# Altium PCB PCB1_Tejas.PcbDoc (part 1 of 2)
Units mm, origin at the board's own origin, x right, y up, seen from the top; angles counter-clockwise.
Board outline 78.61 x 97.49 mm, 2 copper layers (Top Layer, Bottom Layer); 119 components, 67 nets, 500 pads, 65 vias.
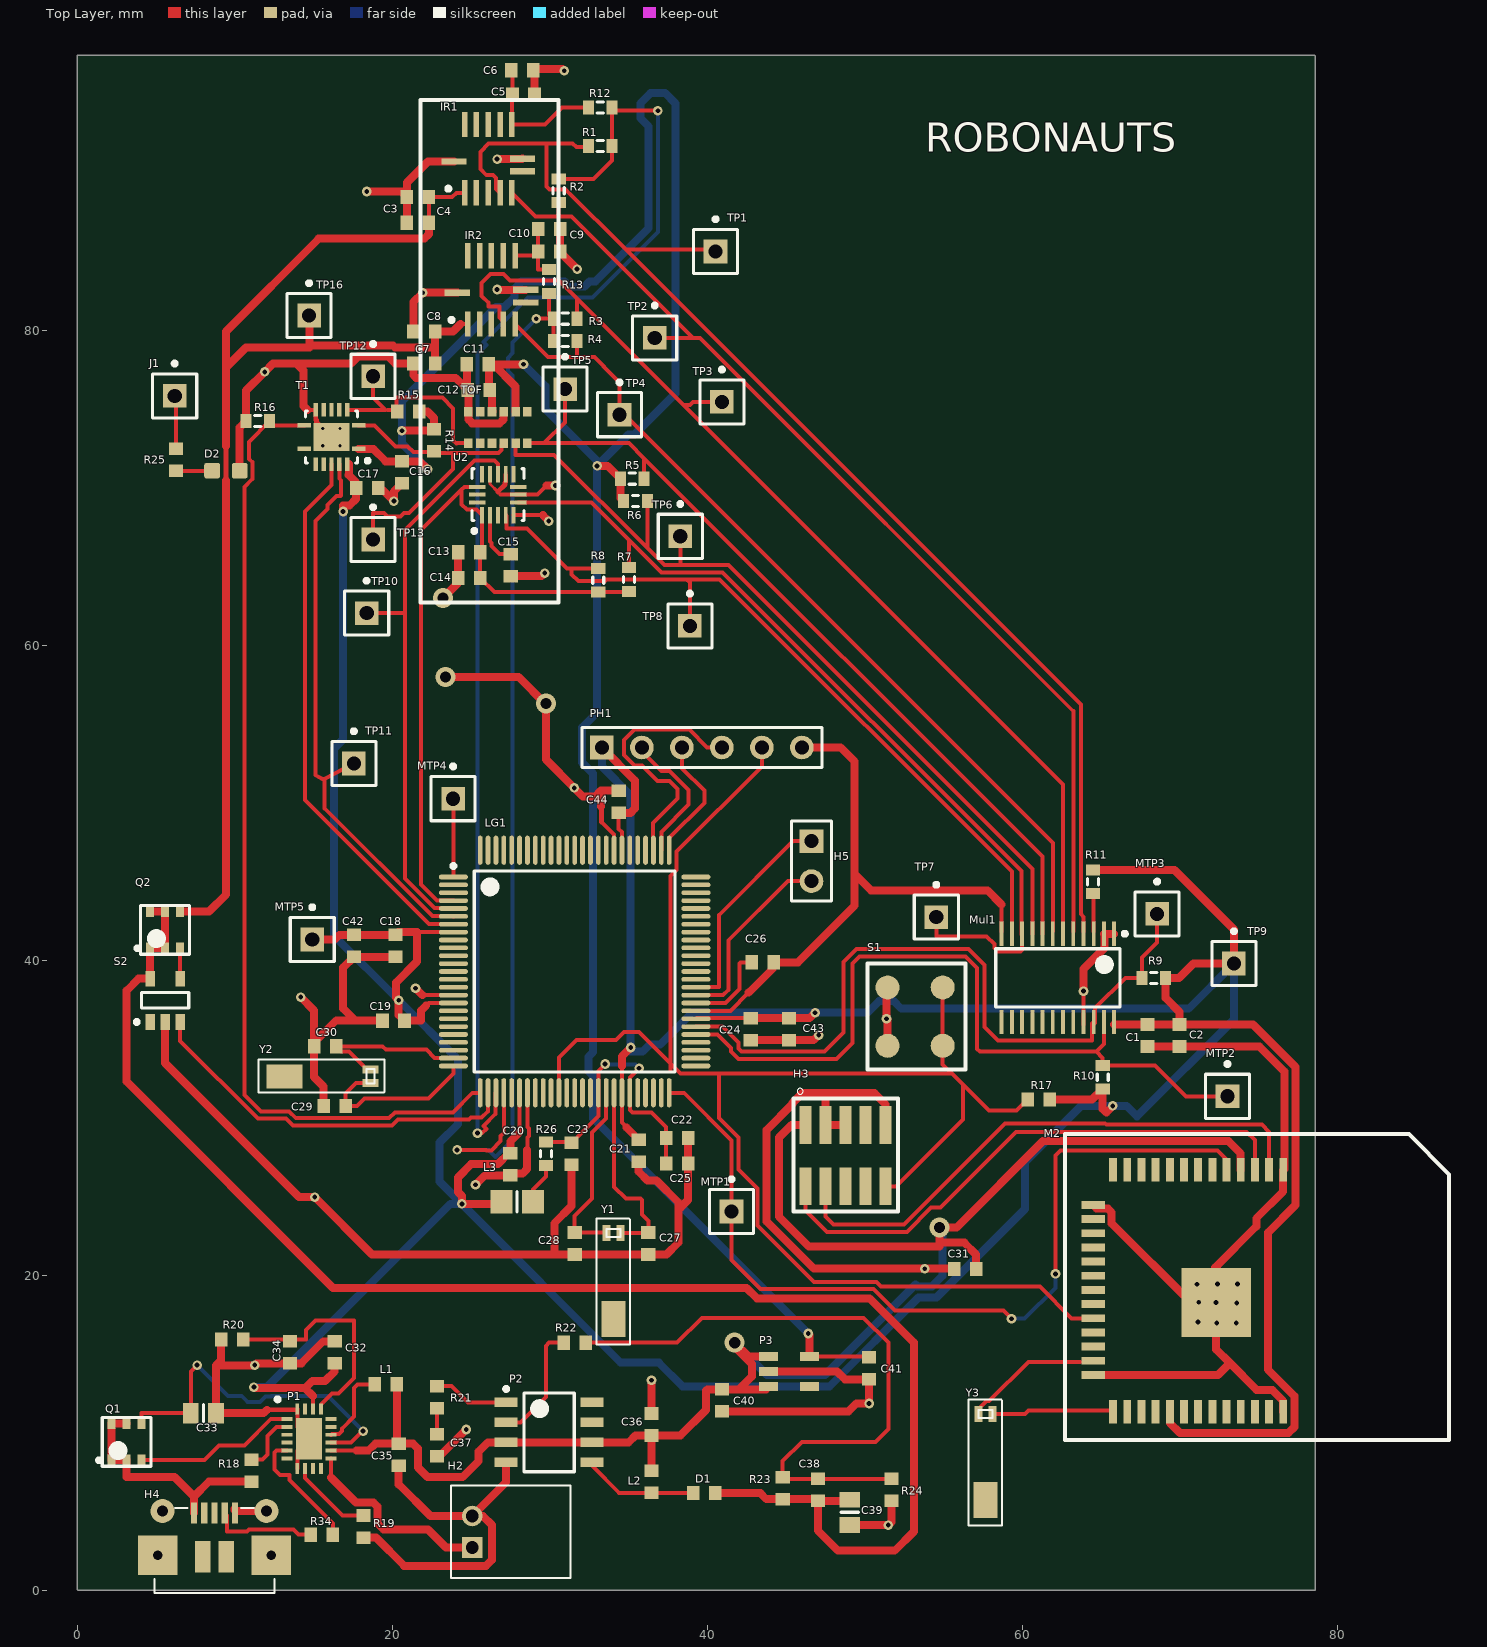
[diagram p0: Top Layer view]
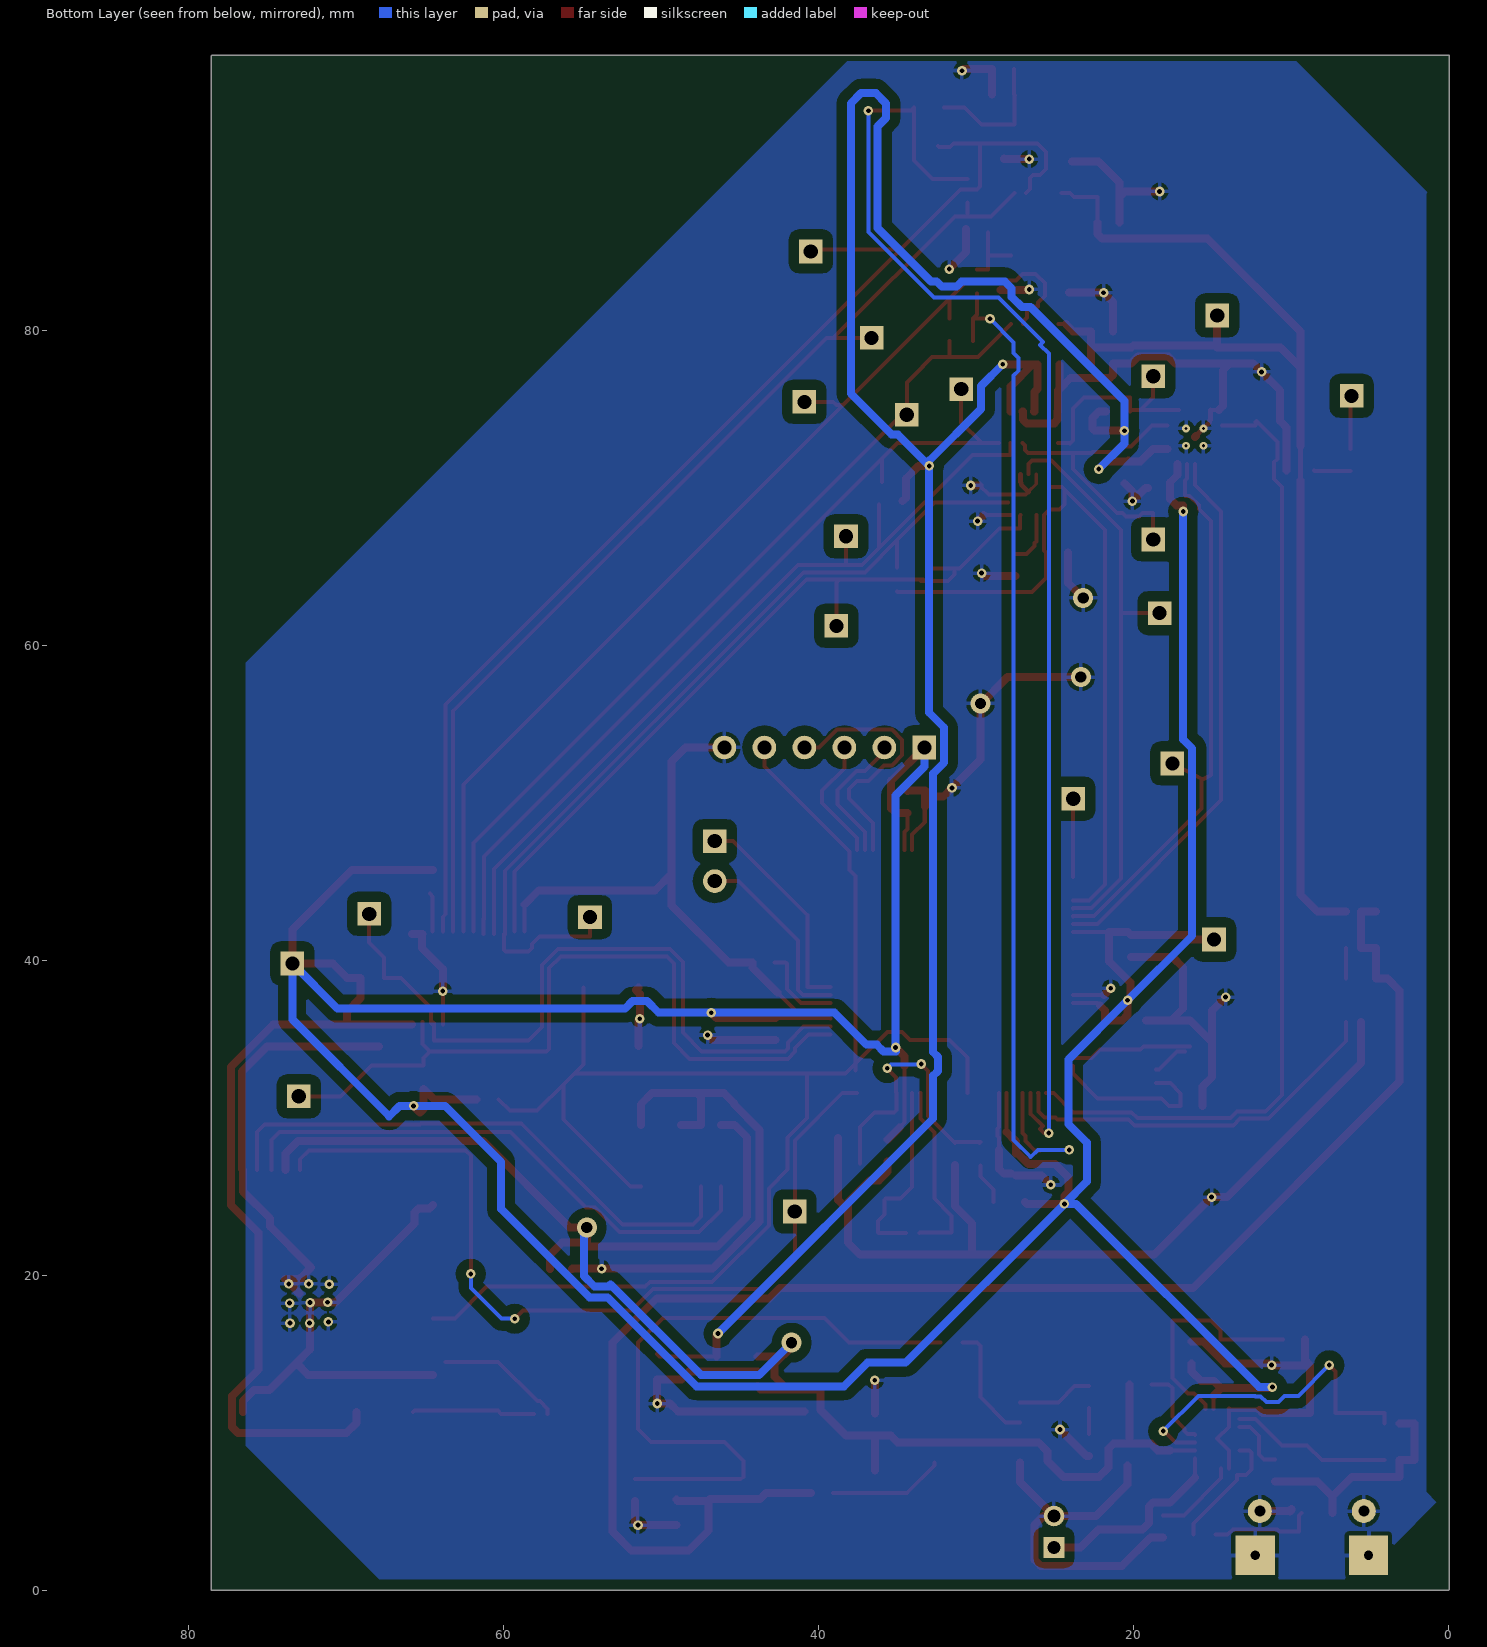
[diagram p1: Bottom Layer view, seen from below]

## Layer stack, top to bottom
Top Solder: solder mask 0.0102, Solder Resist, Dk 3.5
Top Layer: signal copper 0.0356
Dielectric1: dielectric 0.32, FR-4, Dk 4.8
Bottom Layer: signal copper 0.0356
Bottom Solder: solder mask 0.0102, Solder Resist, Dk 3.5

## Board outline
0,0 78.562,0 78.562,97.434 78.511,97.485 78.486,97.46 -0.051,97.46 -0.051,0.051

## Design rules (kind name [scope] priority, off if disabled: settings)
Clearance [All] p1: gap=0.254 ignorepadtopadclearanceinfootprint=TRUE except(0: Arc-Hole Track-Hole SMDPad-Hole THPad-Hole Via-Hole Fill-Hole Poly-Hole Region-Hole Text-Hole; 0.171: Track-SMDPad; 0.203: Arc-SMDPad Track-Track SMDPad-SMDPad; 0.508: Arc-Via Track-Via THPad-Via Via-Via; 0.635: Arc-Poly Track-Poly SMDPad-Poly THPad-Poly Via-Poly Fill-Poly Poly-Poly)
FabricationTestPointUsage TestPointUsage [All] p1: valid=0 allowmultiple=FALSE
FabricationTestpoint Testpoint [All] p1: side=3 testpointundercomponent=TRUE minsize=1.016 maxsize=2.54 preferedsize=1.524 minholesize=0 maxholesize=1.016 preferedholesize=0.813 testpointgrid=0.025 allowsidetop=TRUE allowsidebottom=TRUE usegrid=TRUE gridtolerance=0
PolygonConnect [All] p1: connectstyle=Relief reliefconductorwidth=0.254 reliefentries=4 polygonreliefangle="90 Angle" airgapwidth=0.254
RoutingVias [All] p1: holewidth=0.305 width=0.61 viastyle="Through Hole" minholewidth=0.254 minwidth=0.508 maxholewidth=0.356 maxwidth=0.711
SilkToSolderMaskClearance SilkscreenOverComponentPads [IsPad] p1: minsilkscreentomaskgap=0.254 clearancetoexposedcopper=TRUE
SolderMaskExpansion [All] p1: expansion=0.102
Width Width_power [(InNet('2.8V') OR InNet('3.3V') OR InNet('5V') OR InNet('4V') OR InNet('GND') OR InNet('VBUS') OR InNet('IR_PWR') OR InNet('V_BAT'))] p1: maxlimit=0.508 minlimit=0.305 preferedwidth=0.508
Width Width_1 [All] p2: maxlimit=0.254 minlimit=0.254 preferedwidth=0.254
27 further rules are at their usual default settings.

## Components (designator, comment, footprint, x,y, rotation, side; value= is the part's Value field where it differs from the comment)
C1 "Cap Semi" 1608[0603] 67.92,35.23 r90 top value=10uF
C2 "Cap Semi" 1608[0603] 69.952,35.23 r90 top value=0.1uF
C3 "Cap Semi" 1608[0603] 21.59,88.468 r0 top value=0.1uF
C4 "Cap Semi" 1608[0603] 21.59,86.843 r0 top value=22uF
C5 "Cap Semi" 1608[0603] 28.219,96.52 r180 top value=10uF
C6 "Cap Semi" 1608[0603] 28.296,94.971 r180 top value=0.1uF
C7 "Cap Semi" 1608[0603] 21.996,77.902 r0 top value=0.1uF
C8 "Cap Semi" 1608[0603] 21.996,79.934 r0 top value=22uF
C9 "Cap Semi" 1608[0603] 29.921,86.436 r180 top value=10uF
C10 "Cap Semi" 1608[0603] 29.921,85.014 r180 top value=0.1uF
C11 "Cap Semi" 1608[0603] 25.4,77.851 r0 top value=4.7uF
C12 "Cap Semi" 1608[0603] 25.451,76.225 r0 top value=0.1uF
C13 "Cap Semi" 1608[0603] 24.841,65.913 r0 top value=4.7uF
C14 "Cap Semi" 1608[0603] 24.841,64.287 r0 top value=0.1uF
C15 "Cap Semi" 1608[0603] 27.483,65.1 r90 top value=0.1uF
C16 "Cap Semi" 1608[0603] 20.574,70.993 r90 top value=1uF
C17 "Cap Semi" 1608[0603] 18.364,70.002 r180 top value=1uF
C18 "Cap Semi" 1608[0603] 20.168,40.919 r90 top value=0.1uF
C19 "Cap Semi" 1608[0603] 20.041,36.17 r0 top value=0.1uF
C20 "Cap Semi" 1608[0603] 27.457,27.051 r90 top value=0.1uF
C21 "Cap Semi" 1608[0603] 35.611,27.915 r90 top value=0.1uF
C22 "Cap Semi" 1608[0603] 38.049,28.727 r180 top value=10nF
C23 "Cap Semi" 1608[0603] 31.344,27.711 r90 top value=10nF
C24 "Cap Semi" 1608[0603] 42.723,35.636 r90 top value=10uF
C25 "Cap Semi" 1608[0603] 38.049,27.102 r180 top value=10uF
C26 "Cap Semi" 1608[0603] 43.485,39.878 r180 top value=1uF
C27 "Cap Semi" 1608[0603] 36.22,22.022 r90 top value=7.5pF
C28 "Cap Semi" 1608[0603] 31.547,22.022 r90 top value=7.5pF
C29 "Cap Semi" 1608[0603] 16.307,30.759 r0 top value=18pF
C30 "Cap Semi" 1608[0603] 15.697,34.544 r0 top value=18pF
C31 "Cap Semi" 1608[0603] 56.337,20.396 r0 top value=10uF
C32 "Cap Semi" 1608[0603] 16.307,15.113 r90 top value=0.1uF
C33 "Cap" 6-0805_L 7.976,11.252 r180 top value=47uF
C34 "Cap" 1608[0603] 13.462,15.113 r270 top value=0.1uF
C35 "Cap" 1608[0603] 20.371,8.611 r90 top value=47uF
C36 "Cap" 1608[0603] 36.424,10.53 r270 top value=4.7uF
C37 "Cap" 1608[0603] 22.809,9.22 r90 top value=100pF
C38 "Cap" 1608[0603] 46.99,6.375 r270 top value=330pF
C39 "Cap" 6-0805_L 49.022,4.953 r90 top value=47uF
C40 "Cap Semi" 1608[0603] 40.894,12.065 r90 top value=0.1uF
C41 "Cap Semi" 1608[0603] 50.241,14.097 r90 top value=0.1uF
C42 "Cap Semi" 1608[0603] 17.526,40.919 r90 top value=10uF
C43 "Cap Semi" 1608[0603] 45.161,35.636 r90 top value=0.1uF
C44 "Cap Semi" 1608[0603] 34.341,50.063 r270 top value=0.1uF
D1 "Diode" 1608[0603] 39.765,6.172 r0 top
D2 "LED0" LED-0603 9.398,71.095 r90 top
H2 "Li-on" battery 23.774,6.639 r270 top
H3 "Radio_Header" "Cortex Debug Header" 46.202,29.548 r0 top
H4 "*" MicroUSB_ConnOld 8.673,4.134 r0 top
H5 "Data Out" HDR1X2 46.584,47.574 r270 top
IR1 "VCNL4010" 13-WQFN 26.06,90.907 r0 top
IR2 "VCNL4010" 13-WQFN 26.264,82.575 r0 top
J1 "Socket" PIN1 6.147,75.844 r0 top
L1 "Inductor" 1608[0603] 19.558,13.081 r0 top value=3.3uH
L2 "Inductor" 1608[0603] 36.424,6.895 r270 top value=4.7uH
L3 "Inductor" 6-0805_M 27.889,24.663 r180 top value="1kohm @ 100 MHz"
LG1 "" ENMR-LQFP100_M 31.547,39.294 r0 top
M2 "" ATMELSAMB11 64.472,26.695 r270 top
MTP1 "Socket" PIN1 41.504,24.054 r0 top
MTP2 "Socket" PIN1 73,31.369 r0 top
MTP3 "Socket" PIN1 68.529,42.951 r0 top
MTP4 "Socket" PIN1 23.825,50.267 r0 top
MTP5 "Socket" PIN1 14.884,41.326 r0 top
Mul1 "TCA9548A" "TTSOP MULTIPLEXER" 62.23,38.887 r270 top
P1 "LTC4160EUDC#PBF" LTC4160 14.681,9.627 r0 top
P2 "LT1308IS8" LTC1308 29.921,10.033 r0 top
P3 "MIC5219 2.8V" SOT23-5 45.161,13.894 r270 top
PH1 "Programming Header" HDR1X6 33.274,53.518 r0 top
Q1 "MOSFET" "MOSFET SI3442" 3.099,9.423 r90 top
Q2 "MOSFET" "MOSFET SI3442" 5.537,41.935 r90 top
R1 "Res3" J1-0603 33.172,91.719 r0 top value=4.7K
R2 "Res3" J1-0603 30.531,88.875 r90 top value=4.7K
R3 "Res3" J1-0603 30.937,80.747 r180 top value=4.7K
R4 "Res3" J1-0603 30.937,79.324 r180 top value=4.7K
R5 "Res3" J1-0603 35.204,70.587 r180 top value=4.7K
R6 "Res3" J1-0603 35.408,69.164 r180 top value=4.7K
R7 "Res3" J1-0603 35.001,64.186 r270 top value=4.7K
R8 "Res3" J1-0603 33.045,64.135 r270 top value=4.7K
R9 "Res3" J1-0603 68.326,38.887 r180 top value=4.7K
R10 "Res3" J1-0603 65.075,32.588 r90 top value=4.7K
R11 "Res3" J1-0603 64.465,44.983 r270 top value=10K
R12 "Res3" J1-0603 33.172,94.158 r0 top value=10
R13 "Res3" J1-0603 29.921,83.106 r270 top value=10
R14 "Res3" 1608[0603] 22.606,73.025 r90 top value=4.7K
R15 "Res3" 1608[0603] 20.98,74.854 r0 top value=4.7K
R16 "Res3" J1-0603 11.43,74.244 r0 top value=2.2K
R17 "Res1" 1608[0603] 61.011,31.166 r0 top value=10K
R18 "Res1" 1608[0603] 11.024,7.595 r90 top value=6.2K
R19 "Res1" 1608[0603] 18.136,4.05 r90 top value=1K
R20 "Res1" 1608[0603] 9.804,15.926 r180 top value=3.01K
R21 "Res1" 1608[0603] 22.809,12.268 r90 top value=47K
R22 "Res1" 1608[0603] 31.547,15.723 r180 top value=10K
R23 "Res1" 1608[0603] 44.755,6.488 r270 top value=35.7K
R24 "Res1" 1608[0603] 51.664,6.375 r90 top value=11.3K
R25 "Res1" 1608[0603] 6.223,71.78 r270 top value=3K
R26 "Res3" J1-0603 29.718,27.711 r90 top value=10
R34 "Res1" 1608[0603] 15.494,3.531 r0 top value=0
S1 "SW-PB" RESET 50.145,39.802 r270 top
S2 "LTC1981" LTC1981 5.537,37.465 r90 top
T1 "TXS0104E" txs0104e 16.104,73.228 r180 top
TOF "VL6180" VL6180 26.67,73.838 r0 top
TP1 "Socket" PIN1 40.488,85.014 r0 top
TP2 "Socket" PIN1 36.627,79.527 r0 top
TP3 "Socket" PIN1 40.894,75.463 r0 top
TP4 "Socket" PIN1 34.392,74.651 r0 top
TP5 "Socket" PIN1 30.937,76.276 r0 top
TP6 "Socket" PIN1 38.252,66.929 r0 top
TP7 "Socket" PIN1 54.508,42.748 r0 top
TP8 "Socket" PIN1 38.862,61.239 r0 top
TP9 "Socket" PIN1 73.406,39.802 r0 top
TP10 "Socket" PIN1 18.339,62.052 r0 top
TP11 "Socket" PIN1 17.526,52.502 r0 top
TP12 "Socket" PIN1 18.745,77.089 r0 top
TP13 "Socket" PIN1 18.745,66.726 r0 top
TP16 "Socket" PIN1 14.681,80.95 r0 top
U2 "MMA8452Q" MMA8452Q_jk 26.67,69.571 r90 top
Y1 "XTAL" Clock_LFXTAL 47.955,33.376 r180 top
Y2 "XTAL" Clock_LFXTAL 29.261,18.694 r90 top
Y3 "XTAL" Clock_LFXTAL 71.577,21.895 r180 top

## Footprints (in the part's own frame and the unit in brackets; to place one, negate y for a bottom-side part, rotate by r counter-clockwise, add the part's x,y. Pads: shape width x height; smd on the part's side, far side on the other; paste and mask are expansions set on the pad)
6-0805_L [mm] "Chip Resistor, Body 2.0x1.2mm, IPC High Density"
  rect 1x1.3 smd: 1(-0.8,0) 2(0.8,0)
  silkscreen extent 0,-0.55 0,0.55, body extent -1.07,-0.7 1.07,0.7, height 0.7
6-0805_M [mm] "Chip Resistor, Body 2.0x1.2mm, IPC Low Density"
  rect 1.4x1.5 smd: 1(-1,0) 2(1,0)
  silkscreen extent 0,-0.65 0,0.65, body extent -1.07,-0.7 1.07,0.7, height 0.7
13-WQFN [mm] "Footprint for VCNL4010"
  rect 0.35x1.605 smd: 1(-1.5,-2.173) 2(-0.75,-2.173) 3(0,-2.173) 4(0.75,-2.173) 5(1.5,-2.173) 7(1.5,2.173) 8(0.75,2.173) 9(0,2.173) 10(-0.75,2.173) 11(-1.5,2.173)
  rect 1.605x0.4 smd: 6(2.173,-0.8) 12(-2.173,-0.175) 13(2.173,0)
  silkscreen extent -2.67,-2.03 -2.41,-1.78, body extent -1.97,-1.97 1.98,1.98, height 0.75
1608[0603] [mm] "Chip Capacitor, Body 1.6x0.8mm, IPC High Density"
  rect 0.8x0.9 smd: 1(-0.7,0) 2(0.7,0)
  body extent -0.87,-0.48 0.87,0.48, height 1.3
ATMELSAMB11 [mm]
  rect 1.5x0.5 smd: 1(0,12.066) 2(0,11.166) 3(0,10.266) 4(0,9.366) 5(0,8.466) 6(0,7.566) 7(0,6.666) 8(0,5.766) 9(0,4.866) 10(0,3.966) 11(0,3.066) 12(0,2.166) 13(0,1.266) 27(15.367,1.266) 28(15.367,2.166) 29(15.367,3.066) 30(15.367,3.966) 31(15.367,4.866) 32(15.367,5.766) 33(15.367,6.666) 34(15.367,7.566) 35(15.367,8.466) 36(15.367,9.366) 37(15.367,10.266) 38(15.367,11.166) 39(15.367,12.066)
  rect 0.5x1.5 smd: 14(2.222,0) 15(3.122,0) 16(4.022,0) 17(4.922,0) 18(5.822,0) 19(6.722,0) 20(7.622,0) 21(8.522,0) 22(9.422,0) 23(10.322,0) 24(11.222,0) 25(12.122,0) 26(13.022,0)
  rect 4.4x4.4 smd: 40(8.424,7.806)
  silkscreen extent -2.29,-1.78 17.14,22.61
battery [mm] "footprint for battery"
  rect 1.308x1.308 hole 0.8 mask-25.4: 1(3.921,1.27)
  round 1.308 hole 0.8 mask-25.4: 2(1.921,1.27)
  silkscreen extent -0.03,-0.08 5.87,7.52
Clock_LFXTAL [mil]
  rect 20x40 smd: 1(532,421) 2(566,421)
  rect 60x90 smd: 3(549,636)
  silkscreen extent 508,385 591,700
"Cortex Debug Header" [mm] "10 Position Header BTB Connector Gold 0.050\" (1.27mm) Surface Mount"
  rect 0.74x2.4 smd: 1(0,0) 2(0.001,-3.894) 3(1.27,0) 4(1.271,-3.894) 5(2.54,0) 6(2.541,-3.894) 7(3.81,0) 8(3.811,-3.894) 9(5.08,0) 10(5.081,-3.894)
  silkscreen extent -0.76,-5.49 5.89,2.33
ENMR-LQFP100_M [mm] "LQFP, 100-Leads, Body 14x14mm, Pitch 0.5mm, IPC Low Density"
  oval 1.85x0.3 smd: 1(-7.7,6) 2(-7.7,5.5) 3(-7.7,5) 4(-7.7,4.5) 5(-7.7,4) 6(-7.7,3.5) 7(-7.7,3) 8(-7.7,2.5) 9(-7.7,2) 10(-7.7,1.5) 11(-7.7,1) 12(-7.7,0.5) 13(-7.7,0) 14(-7.7,-0.5) 15(-7.7,-1) 16(-7.7,-1.5) 17(-7.7,-2) 18(-7.7,-2.5) 19(-7.7,-3) 20(-7.7,-3.5) 21(-7.7,-4) 22(-7.7,-4.5) 23(-7.7,-5) 24(-7.7,-5.5) 25(-7.7,-6) 51(7.7,-6) 52(7.7,-5.5) 53(7.7,-5) 54(7.7,-4.5) 55(7.7,-4) 56(7.7,-3.5) 57(7.7,-3) 58(7.7,-2.5) 59(7.7,-2) 60(7.7,-1.5) 61(7.7,-1) 62(7.7,-0.5) 63(7.7,0) 64(7.7,0.5) 65(7.7,1) 66(7.7,1.5) 67(7.7,2) 68(7.7,2.5) 69(7.7,3) 70(7.7,3.5) 71(7.7,4) 72(7.7,4.5) 73(7.7,5) 74(7.7,5.5) 75(7.7,6)
  oval 0.3x1.85 smd: 26(-6,-7.7) 27(-5.5,-7.7) 28(-5,-7.7) 29(-4.5,-7.7) 30(-4,-7.7) 31(-3.5,-7.7) 32(-3,-7.7) 33(-2.5,-7.7) 34(-2,-7.7) 35(-1.5,-7.7) 36(-1,-7.7) 37(-0.5,-7.7) 38(0,-7.7) 39(0.5,-7.7) 40(1,-7.7) 41(1.5,-7.7) 42(2,-7.7) 43(2.5,-7.7) 44(3,-7.7) 45(3.5,-7.7) 46(4,-7.7) 47(4.5,-7.7) 48(5,-7.7) 49(5.5,-7.7) 50(6,-7.7) 76(6,7.7) 77(5.5,7.7) 78(5,7.7) 79(4.5,7.7) 80(4,7.7) 81(3.5,7.7) 82(3,7.7) 83(2.5,7.7) 84(2,7.7) 85(1.5,7.7) 86(1,7.7) 87(0.5,7.7) 88(0,7.7) 89(-0.5,7.7) 90(-1,7.7) 91(-1.5,7.7) 92(-2,7.7) 93(-2.5,7.7) 94(-3,7.7) 95(-3.5,7.7) 96(-4,7.7) 97(-4.5,7.7) 98(-5,7.7) 99(-5.5,7.7) 100(-6,7.7)
  silkscreen extent -7.82,-6.38 6.38,6.82, body extent -7,-7 7,7, height 1.6
HDR1X2 [mm] "Connector; Header; 2 Position"
  rect 1.5x1.5 hole 0.9: 1(0,0)
  round 1.5 hole 0.9: 2(2.54,0)
  silkscreen extent -1.27,-1.27 3.81,1.27
HDR1X6 [mm] "Connector; Header; 6 Position"
  rect 1.5x1.5 hole 0.9: 1(0,0)
  round 1.5 hole 0.9: 2(2.54,0) 3(5.08,0) 4(7.62,0) 5(10.16,0) 6(12.7,0)
  silkscreen extent -1.27,-1.27 13.97,1.27
J1-0603 [mm] "Chip Resistor, Body 1.6x0.8mm, IPC High Density"
  rect 0.7x0.9 smd: 1(-0.75,0) 2(0.75,0)
  silkscreen extent -0.2,-0.35 0.2,0.35, body extent -0.85,-0.48 0.85,0.48, height 0.9
LED-0603 [mm] "LED-0603"
  rrect30% 1x1 smd: 1(0,0.877) 2(0,-0.877)
LTC1308 [mm] "SOIC, 8-Leads, Body 4.90x3.90mm, Pitch 1.27mm, IPC Medium Density"
  rect 1.45x0.6 smd: 1(-2.725,1.905) 2(-2.725,0.635) 3(-2.725,-0.635) 4(-2.725,-1.905) 5(2.725,-1.905) 6(2.725,-0.635) 7(2.725,0.635) 8(2.725,1.905)
  silkscreen extent -2.85,-2.5 1.6,2.88, body extent -2,-2.5 2,2.5, height 1.35
LTC1981 [mm] "SOT23, 5-Leads, Body 2.90x2.80mm, Pitch 0.95mm, IPC Medium Density"
  rect 1x0.6 smd: 1(-1.375,0.95) 2(-1.375,0) 3(-1.375,-0.95) 4(1.375,-0.95) 5(1.375,0.95)
  silkscreen extent -1.5,-1.5 0.5,1.92, body extent -0.88,-1.5 0.87,1.5, height 1.45
LTC4160 [mm]
  rect 0.7x0.25 smd: 1(-1.4,1.25) 2(-1.4,0.75) 3(-1.4,0.25) 4(-1.4,-0.25) 5(-1.4,-0.75) 6(-1.4,-1.25) 11(1.4,-1.25) 12(1.4,-0.75) 13(1.4,-0.25) 14(1.4,0.25) 15(1.4,0.75) 16(1.4,1.25)
  rect 0.25x0.7 smd: 7(-0.75,-1.9) 8(-0.25,-1.9) 9(0.25,-1.9) 10(0.75,-1.9) 17(0.75,1.9) 18(0.25,1.9) 19(-0.25,1.9) 20(-0.75,1.9)
  rect 1.65x2.65 smd: 21(0,0)
  silkscreen extent -2.12,2.38 -1.87,2.62, body extent -1.55,-2.05 1.55,2.05, height 1
MicroUSB_ConnOld [mm] "4UCONN_20329"
  rect 0.4x1.35 smd: D+(0,0.775) D-(-0.65,0.775) GND1(1.3,0.775) ID(0.65,0.775) VBUS1(-1.3,0.775)
  rect 2.5x2.5 hole 0.6: GND(-3.6,-1.9) GND(3.6,-1.9)
  round 1.524 hole 0.7: GND(-3.3,0.9) GND(3.3,0.9)
  rect 1x2 smd: GND(-0.75,-2) GND(0.75,-2)
  silkscreen extent -3.8,-4.3 3.8,1.1
MMA8452Q_jk [mm] "QFN, 16-Leads, Body 3.00x3.00mm, Pitch 0.50mm, IPC Medium Density"
  rect 1.05x0.25 smd: 1(-1.3,1) 2(-1.3,0.5) 3(-1.3,0) 4(-1.3,-0.5) 5(-1.3,-1) 9(1.3,-1) 10(1.3,-0.5) 11(1.3,0) 12(1.3,0.5) 13(1.3,1)
  rect 0.25x1.05 smd: 6(-0.5,-1.3) 7(0,-1.3) 8(0.5,-1.3) 14(0.5,1.3) 15(0,1.3) 16(-0.5,1.3)
  silkscreen extent -2.42,-1.65 1.65,1.65, body extent -1.5,-1.5 1.5,1.5, height 1
"MOSFET SI3442" [mil] "TSOP, 6-Leads, Body 3.03x1.63mm, Pitch 0.95mm, IPC Medium Density"
  rect 27.52x20 smd: 1(-45.77,37.4) 2(-45.77,0) 3(-45.77,-37.4) 4(45.77,-37.4) 5(45.77,0) 6(45.77,37.4)
  silkscreen extent -61,-61 61,74, body extent -33,-61 33,61, height 43
PIN1 [mm] "Connector; Plug"
  rect 1.5x1.5 hole 0.9: 1(0,0)
  silkscreen extent -1.4,-1.4 1.4,2.17
RESET [mil]
  round 60 smd: 1(60,50) 1(205.7,50) 2(60,187.8) 2(205.7,187.8)
  silkscreen extent 0,0 265,245
SOT23-5 [mm] "SOT23-5"
  rect 0.55x1.2 smd: 1(-0.95,-1.3) 2(0,-1.3) 3(0.95,-1.3) 4(0.95,1.3) 5(-0.95,1.3)
"TTSOP MULTIPLEXER" [mm] "TSOP, 24-Leads, Body 7.80x4.40mm, Pitch 0.65mm, IPC Medium Density"
  rect 1.55x0.25 smd: 1(-2.8,3.575) 2(-2.8,2.925) 3(-2.8,2.275) 4(-2.8,1.625) 5(-2.8,0.975) 6(-2.8,0.325) 7(-2.8,-0.325) 8(-2.8,-0.975) 9(-2.8,-1.625) 10(-2.8,-2.275) 11(-2.8,-2.925) 12(-2.8,-3.575) 13(2.8,-3.575) 14(2.8,-2.925) 15(2.8,-2.275) 16(2.8,-1.625) 17(2.8,-0.975) 18(2.8,-0.325) 19(2.8,0.325) 20(2.8,0.975) 21(2.8,1.625) 22(2.8,2.275) 23(2.8,2.925) 24(2.8,3.575)
  silkscreen extent -2.92,-3.95 1.85,4.38, body extent -2.25,-3.95 2.25,3.95, height 1.1
txs0104e [mm]
  rect 0.85x0.28 smd: 1(-1.725,0.75) 2(-1.725,-0.75) 8(1.725,-0.75) 9(1.725,0.75)
  rect 0.28x0.85 smd: 3(-1,-1.725) 4(-0.5,-1.725) 5(0,-1.725) 6(0.5,-1.725) 7(1,-1.725) 10(1,1.725) 11(0.5,1.725) 12(0,1.725) 13(-0.5,1.725) 14(-1,1.725)
  rect 2.28x1.78 smd: 15(0,0)
  silkscreen extent -2.43,-1.65 1.65,1.65, body extent -1.83,-1.83 1.83,1.83, height 1
VL6180 [mm] "VL6180"
  rect 0.55x0.6 smd paste-0.3: 1(-1.875,-1) 2(-1.125,-1) 3(-0.375,-1) 4(0.375,-1) 5(1.125,-1) 6(1.875,-1) 7(1.875,1) 8(1.125,1) 9(0.375,1) 10(-0.375,1) 11(-1.125,1) 12(-1.875,1)

## Part data
C1 C5 C9 C24 C25 C42: "Capacitor (Semiconductor SIM Model)", Digikey Part No=490-10474-1-ND, Manufacturer="Murata Electronics North America", Manufacturer Part Number=GRM188R61A106KE69D, ComponentLink1Description=Datasheet, ComponentLink1URL=http://search.murata.co.jp/Ceramy/image/img/A01X/partnumbering_e_01.pdf
C2 C6 C7 C10 C12 C14 C15 C18 C19 C20 C21 C43 C44: "Capacitor (Semiconductor SIM Model)", Digikey Part No=399-1095-1-ND, Manufacturer=KEMET, Manufacturer Part Number=C0603C104K8RACTU, ComponentLink1Description=Datasheet, ComponentLink1URL=http://www.kemet.com/Lists/ProductCatalog/Attachments/53/KEM_C1002_X7R_SMD.pdf
C3 C32 C40 C41: "CAP CER 0.1UF 10V X7R 0603", Digikey Part No=399-1095-1-ND, Manufacturer=KEMET, Manufacturer Part Number=C0603C104K8RACTU, ComponentLink1Description=Datasheet, ComponentLink1URL=http://www.kemet.com/Lists/ProductCatalog/Attachments/53/KEM_C1002_X7R_SMD.pdf
C4 C8: "CAP CER 22UF 6.3V X5R 0603", Digikey Part No=490-7611-1-ND, Manufacturer="Murata Electronics North America", Manufacturer Part Number=GRM188R60J226MEA0D, ComponentLink1Description=Datasheet, ComponentLink1URL=http://search.murata.co.jp/Ceramy/image/img/A01X/partnumbering_e_01.pdf
C11 C13: "Capacitor (Semiconductor SIM Model)", Digikey Part No=490-10477-1-ND, Manufacturer="Murata Electronics North America", Manufacturer Part Number=GRM188R61A475KE15D, ComponentLink1Description=Datasheet, ComponentLink1URL=http://search.murata.co.jp/Ceramy/image/img/A01X/partnumbering_e_01.pdf
C16 C17 C26: "Capacitor (Semiconductor SIM Model)", Digikey Part No=1276-1946-1-ND, Manufacturer="Samsung Electro-Mechanics America, Inc.", Manufacturer Part Number=CL10B105KP8NNNC, ComponentLink1Description=Datasheet, ComponentLink1URL=http://www.digikey.com/product-detail/en/samsung-electro-mechanics-america-inc/CL10B105KP8NNNC/1276-1946-1-ND/3890032
C22 C23: "CAP CER 10000PF 50V X7R 0603", Digikey Part No=311-1085-1-ND, Manufacturer=Yageo, Manufacturer Part Number=CC0603KRX7R9BB103, ComponentLink1Description=Datasheet, ComponentLink1URL=http://www.yageo.com/exep/pages/download/literatures/ProductSelectionGuide%202014_Final_2.pdf
C27 C28: "Capacitor (Semiconductor SIM Model)", Manufacturer=AVX, Manufacturer Part Number=02013A7R5BAT2A, Mouser Part No=581-02013A7R5BAT2A, ComponentLink1Description=Datasheet, ComponentLink1URL=http://www.mouser.com/ProductDetail/AVX/02013A7R5BAT2A/?qs=sGAEpiMZZMs0AnBnWHyRQB52zW9BgkFE2gr3mrXUPHs%3d
C29 C30: "Capacitor (Semiconductor SIM Model)", Digikey Part No=712-1321-1-ND, Manufacturer="Johanson Technology Inc.", Manufacturer Part Number=251R14S180GV4T, ComponentLink1Description=Datasheet, ComponentLink1URL=http://www.digikey.com/product-detail/en/johanson-technology-inc/251R14S180GV4T/712-1321-1-ND/1786783
C31: "CAP CER 10UF 10V X5R 0603", Digikey Part No=490-10474-1-ND, Manufacturer="Murata Electronics North America", Manufacturer Part Number=GRM188R61A106KE69D, ComponentLink1Description=Datasheet, ComponentLink1URL=http://search.murata.co.jp/Ceramy/image/img/A01X/partnumbering_e_01.pdf
C33 C39: "CAP CER 47UF 6.3V X5R 0805", Digikey Part No=490-13249-1-ND, Manufacturer="Murata Electronics North America", Manufacturer Part Number=GRM219R60J476ME44D, ComponentLink1Description=Datasheet, ComponentLink1URL=http://search.murata.co.jp/Ceramy/image/img/A01X/partnumbering_e_01.pdf
C34: "CAP CER 0.1UF 16V X7R 0603", Digikey Part No=311-1088-1-ND, Manufacturer=Yageo, Manufacturer Part Number=CC0603KRX7R7BB104, ComponentLink1Description=Datasheet, ComponentLink1URL=http://www.yageo.com/documents/recent/UPY-GPHC_X7R_6.3V-to-50V_17.pdf
C35: "CAP CER 22UF 6.3V X5R 1206", Digikey Part No=490-13247-1-ND, Manufacturer="Murata Electronics North America", Manufacturer Part Number=GRM188R60J476ME15D, ComponentLink1Description=Datasheet, ComponentLink1URL=http://search.murata.co.jp/Ceramy/image/img/A01X/partnumbering_e_01.pdf
C36: "CAP CER 4.7UF 6.3V X7R 0603", Digikey Part No=1276-2087-1-ND, Manufacturer="Samsung Electro-Mechanics America, Inc.", Manufacturer Part Number=CL10B475KQ8NQNC, ComponentLink1Description=Datasheet, ComponentLink1URL=http://media.digikey.com/pdf/Data%20Sheets/Samsung%20PDFs/CL10B475KQ8NQNC_Spec.pdf
C37: "CAP CER 100PF 50V X7R 0603", Digikey Part No=399-7824-1-ND, Manufacturer=KEMET, Manufacturer Part Number=C0603C101K5RACTU, ComponentLink1Description=Datasheet, ComponentLink1URL=http://www.kemet.com/docfinder?Partnumber=C0603C101K5RACTU
C38: "CAP CER 330PF 100V X7R 0603", Digikey Part No=1276-6658-1-ND, Manufacturer="Samsung Electro-Mechanics America, Inc.", Manufacturer Part Number=CL10B331KC8WPNC, ComponentLink1Description=Datasheet, ComponentLink1URL=http://www.samsungsem.com/kr/support/library/product-catalog/__icsFiles/afieldfile/2016/09/27/MLCC.pdf
D1: "Default Diode", Digikey Part No=CD0603-S01575CT-ND, Manufacturer="Bourns Inc.", Manufacturer Part Number=CD0603-S01575, ComponentLink1Description=Datasheet, ComponentLink1URL=http://www.bourns.com/docs/Product-Datasheets/CD0603_1005.pdf
D2: "Typical INFRARED GaAs LED", Digikey Part No=732-4981-1-ND, Manufacturer="Wurth Electronics Inc.", Manufacturer Part Number=150060YS75000, ComponentLink1Description=Datasheet, ComponentLink1URL=http://katalog.we-online.de/led/datasheet/150060YS75000.pdf
H2: library part battery
H4: library part USB-AB-MICRO
H5: library part "Header 2", "Header, 2-Pin", LatestRevisionDate=17-Jul-2002, LatestRevisionNote="Re-released for DXP Platform.", Publisher="Altium Limited"
IR1 IR2: "VCNL4010 Proximity and Ambient Light Sensor", Digikey Part Number=VCNL4010-GS08CT-ND, Manufacturer=Vishay, Part Number=VCNL4010
L1: "FIXED IND 3.3UH 30MA 1.3 OHM SMD", Digikey Part No=587-1584-1-ND, Manufacturer="Taiyo Yuden", Manufacturer Part Number=LK16083R3K-T, ComponentLink1Description Datasheet=Datasheet, ComponentLink1URL=http://www.yuden.co.jp/productdata/catalog/en/mlci01_e.pdf
L2: "FIXED IND 4.7UH 350MA 500 MOHM", Digikey Part No=445-6390-1-ND, Manufacturer="TDK Corporation", Manufacturer Part Number=MLZ1608M4R7WT000, ComponentLink1Description Datasheet=Datasheet, ComponentLink1URL=https://product.tdk.com/info/en/catalog/datasheets/inductor_commercial_decoupling_mlz1608_en.pdf
L3: Digikey Part No=490-1047-1-ND, Manufacturer="Murata Electronics North America", Manufacturer Part Number=BLM21BD102SN1D, ComponentLink1Description=Datasheet, ComponentLink1URL=http://www.murata.com/en-global/products/productdata/8796733767710/S0580E.pdf
LG1: library part EFM32LG980F256-QFP100, "EFM32 Leopard Gecko, M3 ARM Cortex CPU, 256 KB Flash, 32 KB RAM, 1.85 - 3.8 V Supply, 48 MHz Max Speed, -40 to 85 degC, 100-Pin LQFP, RoHS Compliant", Generic Part Number=EFM32LG980, Supplier Part Number 1=914-1058-2-ND, Supply Voltage (V)="1.85 - 3.8", ARM Cortex CPU=M3, ComponentLink1Description="Manufacturer URL", ComponentLink1URL=http://www.energymicro.com/, ComponentLink2Description=Datasheet, ComponentLink2URL=http://cdn.energymicro.com/dl/devices/pdf/d0122_efm32lg980_datasheet.pdf, ComponentLink3Description="Package Specification", ComponentLink3URL=http://cdn.energymicro.com/dl/devices/pdf/d0006_efm32g280_datasheet.pdf, DatasheetVersion="Rev 1.00", Flash (KB)=256, GPIO=83, LCD=8x34, LESENSE=Y, Max Speed (MHz)=48, Mounting Technology="Surface Mount", OPAMPS=3, PackageDescription="100-Pin Low rofile Quad Flat Package, Body 14 x 14 mm, Pitch 0.5 mm", PackageReference=LQFP100, PackageVersion="Rev. 98A0100QP043_03MAY2007", PartNumber=EFM32LG980F256-QFP100, RAM (KB)=32, Subcategory="EFM32 Leopard Gecko", Supplier 1=Digi-Key, Supplier 2=Digi-Key, Supplier 3=Digi-Key, Supplier 4=Mouser, Supplier Part Number 2=914-1058-1-ND, Supplier Part Number 3=914-1058-6-ND, Supplier Part Number 4=904-EFM32LG980F256, USB=Y
M2: library part ATSAMB11, "Radio"
Mul1: "8-Channel I2C Switch", Digikey Part Number=296-39222-1-ND, Manufacturer="Texas Instruments", Part Number=TCA9548A
P1: "IC SWITCH POWER MANAGER 20-QFN", Digikey Part No=TC4160EUDC#PBF-ND, Manufacturer="Linear Technology", ComponentLink1Description=Datasheet, ComponentLink1URL=http://www.linear.com/docs/27893, Manufacturer Part Number=LTC4160EUDC#PBF
P2: "IC REG BOOST ADJ 2A 8SOIC", Digikey Part No=LT1308IS8#PBF-ND, Manufacturer="Linear Technology", Manufacturer Part Number=LT1308IS8#PBF, ComponentLink1Description=Datasheet, ComponentLink1URL=http://www.linear.com/docs/1489
P3: library part V_REG_MIC52193.3V, "V_REG MIC5219Standard 3.3V and 5V 500mA LDO voltage regulator in SOT-23 layout. Micrel part MIC5219. BP (by-pass) pin is used to lower output noise with 470pF cap, may be left open.", PROD_ID=VREG-09872
PH1: library part "Header 6", "Header, 6-Pin", LatestRevisionDate=17-Jul-2002, LatestRevisionNote="Re-released for DXP Platform.", Publisher="Altium Limited"
R1 R2 R3 R4 R5 R6 R7 R8 R9 R10 R14 R15: "Resistor", Digikey Part No=311-4.7KGRCT-ND, Manufacturer=Yageo, Manufacturer Part Number=RC0603JR-074K7L, ComponentLink1Description=Datasheet, ComponentLink1URL=http://www.digikey.com/product-detail/en/yageo/RC0603JR-074K7L/311-4.7KGRCT-ND/729732
R11: "Resistor", Digikey Part No=311-10KJRCT-ND, Manufacturer=Yageo, Manufacturer Part Number=RC0402JR-0710KL, ComponentLink1Description=Datasheet, ComponentLink1URL=http://www.digikey.com/product-detail/en/yageo/RC0402JR-0710KL/311-10KJRCT-ND/729365
R12 R13 R26: "Resistor", Digikey Part No=311-10.0HRCT-ND, Manufacturer=Yageo, Manufacturer Part Number=RC0603FR-0710RL, ComponentLink1Description=Datasheet, ComponentLink1URL=http://www.digikey.com/product-detail/en/yageo/RC0603FR-0710RL/311-10.0HRCT-ND/729826
R16: "Resistor", Digikey Part No=311-2.20KLRCT-ND, Manufacturer=Yageo, Manufacturer Part Number=RC0402FR-072K2L, ComponentLink1Description=Datasheet, ComponentLink1URL=http://www.digikey.com/product-detail/en/yageo/RC0402FR-072K2L/311-2.20KLRCT-ND/729500
R17 R22 R25: "RES SMD 10K OHM 1% 1/10W 0603", Digikey Part No=311-10.0KHRCT-ND, Manufacturer=Yageo, Manufacturer Part Number=RC0603FR-0710KL, ComponentLink1Description=Datasheet, ComponentLink1URL=http://www.yageo.com.tw/exep/pages/download/literatures/PYu-R_INT-thick_7.pdf
R18: "RES SMD 6.2K OHM 1% 1/10W 0603", Digikey Part No=311-6.20KHRCT-ND, Manufacturer=Yageo, Manufacturer Part Number=RC0603FR-076K2L, ComponentLink1Description=Datasheet, ComponentLink1URL=http://www.yageo.com.tw/exep/pages/download/literatures/PYu-R_INT-thick_7.pdf
R19: "RES SMD 1K OHM 1% 1/10W 0603", Digikey Part No=311-1.00KHRCT-ND, Manufacturer=Yageo, Manufacturer Part Number=RC0603FR-071KL, ComponentLink1Description=Datasheet, ComponentLink1URL=http://www.yageo.com.tw/exep/pages/download/literatures/PYu-R_INT-thick_7.pdf
R20: "RES SMD 3.01K OHM 1% 1/10W 0603", Digikey Part No=311-3.01KHRCT-ND, Manufacturer=Yageo, Manufacturer Part Number=RC0603FR-073K01L, ComponentLink1Description=Datasheet, ComponentLink1URL=http://www.yageo.com.tw/exep/pages/download/literatures/PYu-R_INT-thick_7.pdf
R21 R34: "RES SMD 47K OHM 1% 1/10W 0603", Digikey Part No=311-47.0KHRCT-ND, Manufacturer=Yageo, Manufacturer Part Number=RC0603FR-0747KL, ComponentLink1Description=Datasheet, ComponentLink1URL=http://www.yageo.com.tw/exep/pages/download/literatures/PYu-R_INT-thick_7.pdf
R23: "RES SMD 35.7K OHM 1% 1/10W 0603", Digikey Part No=311-35.7KHRCT-ND, Manufacturer=Yageo, Manufacturer Part Number=RC0603FR-0735K7L, ComponentLink1Description=Datasheet, ComponentLink1URL=http://www.yageo.com.tw/exep/pages/download/literatures/PYu-R_INT-thick_7.pdf
R24: "RES SMD 11.3K OHM 1% 1/10W 0603", Digikey Part No=311-11.3KHRCT-ND, Manufacturer=Yageo, Manufacturer Part Number=RC0603FR-0711K3L, ComponentLink1Description=Datasheet, ComponentLink1URL=http://www.yageo.com.tw/exep/pages/download/literatures/PYu-R_INT-thick_7.pdf
S1: "SWITCH TACTILE SPST-NO 0.05A 15V", Digikey Part No=EG4621CT-ND, Manufacturer=E-Switch, Manufacturer Part Number=TL3315NF160Q, ComponentLink1Description=Datasheet, ComponentLink1URL=https://media.digikey.com/pdf/Data%20Sheets/E-Switch%20PDFs/TL3315.pdf
T1: "TXS0104E LEVEL SHIFTER"
U2: "MMA8452Q 3-Axis, 12/8-bit Digital Accelerometer  Supply Voltage: 1.6-3.6V  Range: +/- 2g, 4g, 8g  Interface: I2C, 12-bit and 8-bit  ODR: 1.56 Hz - 800 Hz  Package: QFN-16      http://cache.freescale.com/files/sensors/doc/data_sheet/MMA8452Q.pdf"
Y1 Y2 Y3: "Crystal Oscillator", LatestRevisionDate=17-Jul-2002, LatestRevisionNote="Re-released for DXP Platform.", PackageDescription="Crystal, Thru-Hole; 2 Leads; Body 3.1 x 8.2 mm (Dia.xH)", PackageReference=R38, Published=8-Jun-2000, Publisher="Altium Limited"
J1 MTP1 MTP2 MTP3 MTP4 MTP5 TP1 TP2 TP3 TP4 TP5 TP6 TP7 TP8 TP9 TP10 TP11 TP12 TP13 TP16: LatestRevisionDate=17-Jul-2002, LatestRevisionNote="Re-released for DXP Platform.", Publisher="Altium Limited"
TOF: PROD_ID=IC-12007

## Via types
v1: diameter 0.61, hole 0.305, Top Layer to Bottom Layer, 56 vias
v2: diameter 1.27, hole 0.711, Top Layer to Bottom Layer, 5 vias
v3: diameter 0.5, hole 0.2, Top Layer to Bottom Layer, 4 vias

## Nets (pads, with @x,y where several pads share a name; then routed paths per layer and width w, separated by ;. In a path a pad name is that pad's centre, name@x,y a point inside that pad or via, vN(x,y) a via of type N, cw(c..) or ccw(c..) an arc to the next point about the centre after c; other vN are vias at no path point)
2.8V: C11.2 C12.2 C16.2 C41.2 P3.5 R5.2 R6.2 R14.2 R15.2 T1.1 TOF.8 TOF.10 | length 158.3
  Top Layer w0.254: P3.5@46.461,14.844 50.085,14.844 C41.2@50.241,15
  Top Layer w0.508: T1.1@17.829,72.478 18.759,72.478 19.544,71.693 20.371,71.693 C16.2@20.307,71.756 ; C16.2@20.574,71.693 20.576,71.691 21.705,71.691 v1(22.2,71.196) ; v1(20.574,73.635) 22.466,73.635 22.606,73.775 22.606,74.447 22.2,74.854 R15.2@21.73,74.854 ; TOF.10@26.313,74.838 TOF.10@26.295,74.838 26.295,76.081 C12.2@26.151,76.225 26.1,76.276 C11.2@26.1,77.851 C11.2@26.391,77.851 ; TOF.8@27.795,74.838 27.795,76.447 C11.2@26.391,77.851 ; v1(28.296,77.851) C11.2@26.391,77.851 ; v1(32.969,71.399) 33.642,71.399 R5.2@34.454,70.587 34.454,69.367 R6.2@34.658,69.164 ; v1(46.38,16.307) 46.461,16.226 P3.5@46.461,14.844
  Bottom Layer w0.508: v1(22.2,71.196) 20.574,72.822 v1(20.574,73.635) 20.574,75.514 26.543,81.483 27.082,81.483 27.737,82.138 27.737,82.677 28.169,83.109 30.906,83.109 31.236,82.779 32.162,82.779 32.492,83.109 32.854,83.109 36.246,86.5 36.246,92.958 35.712,93.492 35.712,94.418 36.355,95.061 36.355,95.072 37.293,95.072 37.948,94.418 37.948,75.988 35.352,73.393 34.962,73.393 v1(32.969,71.399) ; v1(28.296,77.851) 29.679,76.467 29.679,75.018 32.969,71.728 v1(32.969,71.399) ; v1(46.38,16.307) 32.715,29.972 32.715,32.678 32.413,32.98 32.413,33.864 32.715,34.166 32.715,51.858 32.016,52.557 32.016,54.776 32.969,55.729 v1(32.969,71.399)
3.3V: C1.2 C2.2 C17.2 C18.2 C19.2 C20.2 C21.2 C24.2 C32.1 C42.2 C43.2 C44.2 L3.2 LG1.8 LG1.17 LG1.31 LG1.44 LG1.57 LG1.82 M2.31 MTP5.1 Mul1.24 P1.18 PH1.1 R9.1 R10.1 R11.1 R17.2 T1.14 TP9.1 | length 335.1
  Top Layer w0.254: P1.18@14.931,11.527 14.931,12.331 ; 21.539,41.808 LG1.8@23.847,41.794 ; 22.282,37.294 LG1.17@23.847,37.294 ; 28.047,29.088 LG1.31@28.047,31.594 ; C44.2@34.341,49.363 34.341,48.348 34.547,48.142 LG1.82@34.547,46.994 ; 34.547,33.299 LG1.44@34.547,31.594 34.547,29.715 34.849,29.413 ; LG1.57@39.247,36.294 39.289,36.336 C24.2@42.723,36.336
  Top Layer w0.508: v1(11.176,12.903) 11.248,12.831 14.431,12.831 ; MTP5.1@14.884,41.326 16.307,41.326 16.6,41.619 C42.2@17.526,41.619 C18.2@20.168,41.619 20.357,41.808 21.539,41.808 21.539,39.929 20.193,38.583 20.193,37.643 v1(20.371,37.465) 20.371,36.539 C19.2@20.741,36.17 21.793,36.17 21.793,36.805 22.111,37.122 ; 14.931,12.331 14.431,12.831 ; C32.1@16.307,14.413 16.307,13.894 15.697,13.284 14.884,13.284 14.431,12.831 ; v1(16.84,68.504) 16.84,68.896 17.258,68.896 17.664,69.302 C17.2@17.664,70.002 17.664,70.356 17.188,70.833 17.201,70.846 T1.14@17.201,71.503 ; L3.2@26.889,24.663 26.762,24.536 v1(24.384,24.536) 24.384,25.039 24.13,25.293 24.13,26.219 24.974,27.062 26.672,27.062 27.361,27.751 C20.2@27.457,27.751 27.457,28.499 28.047,29.088 ; PH1.1@33.274,53.518 35.382,51.41 35.382,49.657 35.089,49.363 C44.2@34.341,49.363 ; 34.547,33.299 34.547,33.912 v1(35.103,34.468) ; 34.849,29.377 C21.2@35.611,28.615 ; C24.2@42.723,36.336 C43.2@45.161,36.336 46.471,36.336 v1(46.812,36.678) ; R17.2@61.711,31.166 64.402,31.166 R10.1@65.075,31.838 65.075,30.556 65.303,30.328 65.71,30.734 v1(65.71,30.759) ; R11.1@64.465,45.733 69.633,45.733 73.406,41.961 TP9.1@73.406,39.802 70.841,39.802 69.926,38.887 R9.1@69.076,38.887 69.076,37.604 69.952,36.728 C2.2@69.952,35.93 ; Mul1.24@65.805,35.937 65.813,35.93 C1.2@67.92,35.93 C2.2@69.952,35.93 ; M2.31@69.338,11.328 69.338,10.627 69.982,9.982 76.86,9.982 77.249,10.371 77.249,12.325 75.565,14.009 75.565,22.708 77.318,24.46 77.318,33.238 74.626,35.93 C2.2@69.952,35.93
  Bottom Layer w0.508: v1(11.176,12.903) 12.014,12.903 23.647,24.536 v1(24.384,24.536) ; v1(16.84,68.504) 16.84,54.034 16.268,53.462 16.268,41.568 v1(20.371,37.465) 24.13,33.706 24.13,29.597 22.962,28.428 22.962,25.959 v1(24.384,24.536) ; PH1.1@33.274,53.518 33.274,52.305 35.103,50.476 v1(35.103,34.468) 35.103,34.224 35.093,34.214 35.865,34.214 36.297,34.646 36.957,34.646 38.989,36.678 v1(46.812,36.678) 50.144,36.678 50.881,37.414 51.807,37.414 52.289,36.932 70.536,36.932 TP9.1@73.406,39.802 73.406,36.246 67.259,30.099 66.599,30.759 v1(65.71,30.759) 63.703,30.759 60.147,27.203 60.147,24.211 54.529,18.593 53.381,18.593 47.742,12.954 38.385,12.954 36.887,14.453 34.468,14.453 v1(24.384,24.536)
4V: C31.2 C35.2 C36.2 C40.2 H3.1 L1.2 L2.1 M2.4 P1.12 P2.3 P2.6 P3.1 P3.3 | length 110.5
  Top Layer w0.254: P1.12@16.081,8.877 17.665,8.877 17.678,8.89
  Top Layer w0.508: 17.678,8.89 18.472,8.89 18.892,9.311 C35.2@20.371,9.311 ; L1.2@20.258,13.081 20.258,9.423 C35.2@20.371,9.311 ; L2.1@36.424,7.595 C36.2@36.424,9.83 ; P3.3@43.861,12.944 43.682,12.765 41.98,12.765 ; P3.1@43.861,14.844 42.586,14.844 v2(41.707,15.723) 41.707,15.453 42.804,14.356 42.804,13.589 41.98,12.765 ; H3.1@46.202,29.548 45.321,29.548 44.526,28.753 44.526,23.724 46.431,21.819 54.712,21.819 ; C31.2@57.037,20.396 57.037,21.322 56.286,22.073 54.712,22.073 v2(54.712,23.038) 55.804,23.038 61.29,28.524 73.05,28.524 73.838,27.737 M2.4@73.838,26.695 ; C35.2@20.371,9.311 21.274,9.311 21.59,8.995 21.59,7.798 22.2,7.188 24.435,7.188 25.451,8.204 25.451,8.814 26.035,9.398 P2.3@27.196,9.398 P2.6@32.646,9.398 34.976,9.398 35.408,9.83 C36.2@36.424,9.83 ; C36.2@36.424,9.83 38.252,9.83 39.878,11.455 39.878,12.675 39.968,12.765 C40.2@40.894,12.765 41.98,12.765
  Bottom Layer w0.508: v2(41.707,15.723) 43.764,13.665 47.447,13.665 53.197,19.415 53.309,19.304 54.235,19.304 54.889,19.959 54.889,22.86 v2(54.712,23.038)
5V: C38.2 C39.2 D1.2 Q2.1 Q2.2 Q2.5 Q2.6 R23.2 S2.5 | length 100.4
  Top Layer w0.508: Q2.6@4.587,43.098 Q2.5@5.537,43.098 Q2.2@5.537,40.773 Q2.1@4.587,40.773 S2.5@4.587,38.84 3.864,38.84 3.099,38.075 3.099,32.309 16.205,19.202 42.455,19.202 43.116,18.542 50.267,18.542 53.086,15.723 53.086,3.734 51.867,2.515 48.26,2.515 46.99,3.785 C38.2@46.99,5.675 ; D1.2@40.465,6.172 43.332,6.172 43.716,5.788 R23.2@44.755,5.788 46.877,5.788 C38.2@46.99,5.675 ; C39.2@49.022,5.753 48.944,5.675 C38.2@46.99,5.675
BLE_LEUART_RX: LG1.50 M2.5 MTP1.1 | length 56
  Top Layer w0.254: LG1.50@37.547,31.594 38.477,31.594 41.504,28.567 MTP1.1@41.504,24.054 41.504,20.98 43.358,19.126 50.509,19.126 51.88,17.755 58.776,17.755 v1(59.284,17.247) ; v1(62.078,20.091) 62.078,27.61 62.408,27.94 72.365,27.94 72.938,27.367 M2.5@72.938,26.695
  Bottom Layer w0.254: v1(59.284,17.247) 60.122,17.247 62.078,19.202 v1(62.078,20.091)